# EAGLE board t6713 (EAGLE 8.4.2)
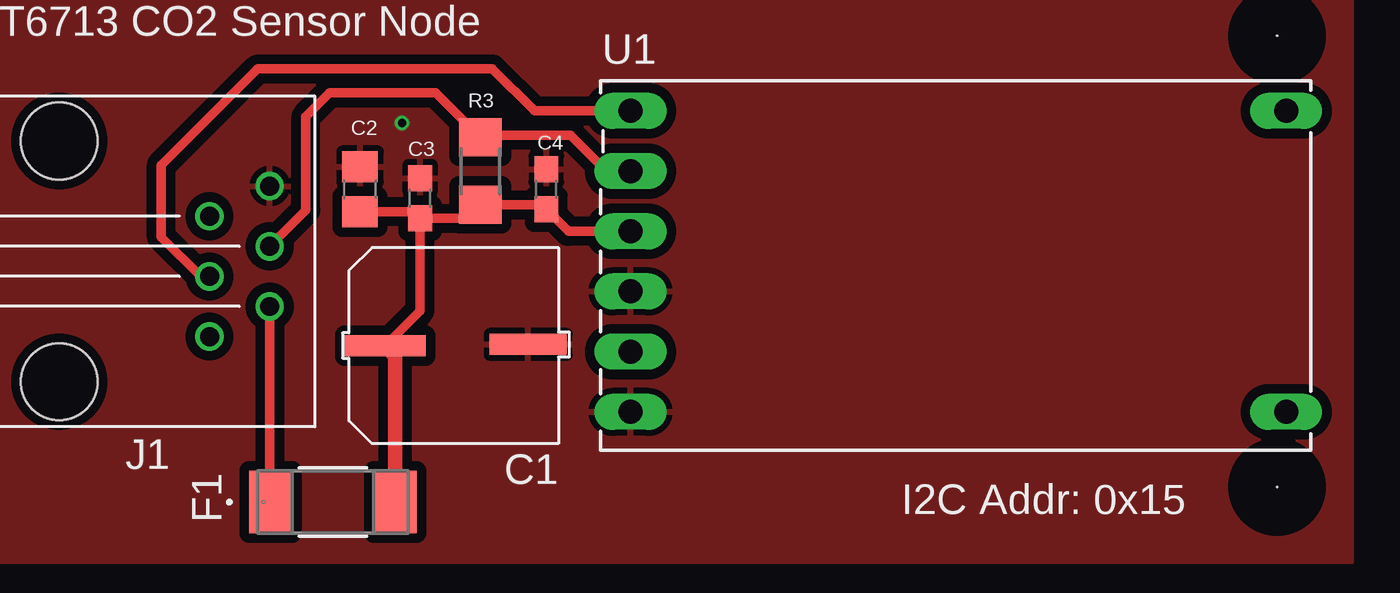
[diagram p0: board, top side]
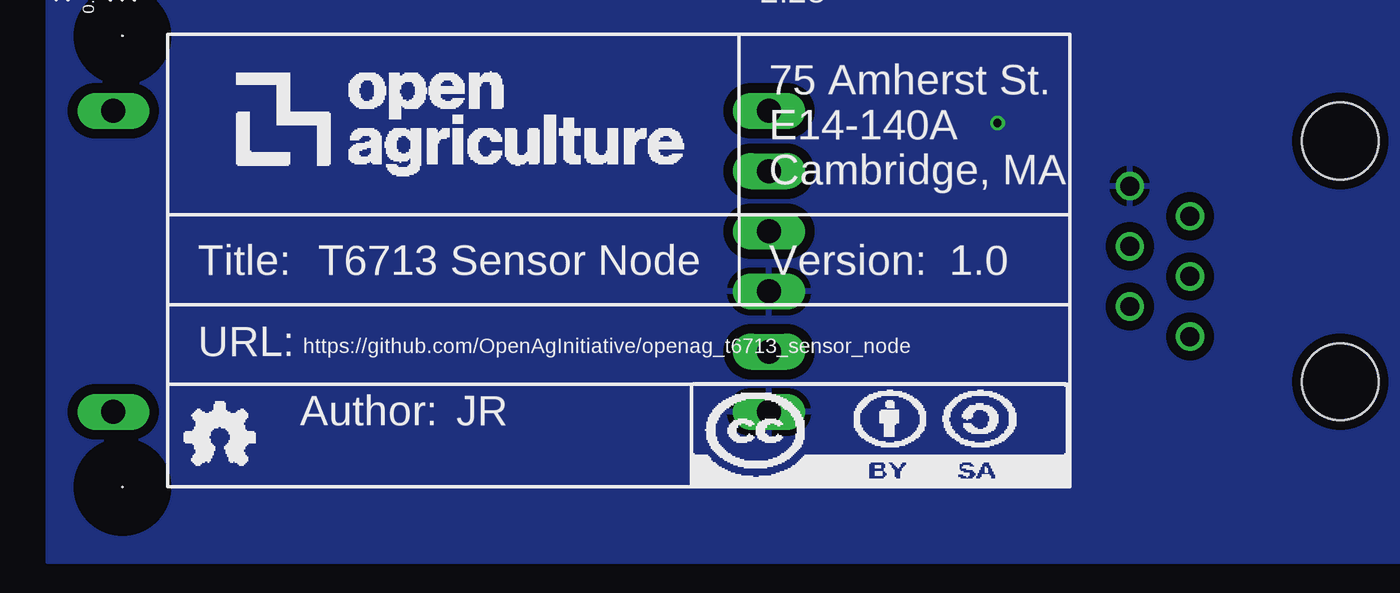
[diagram p1: board, bottom side, seen from below]

No outline drawn. Coordinates in mm, seen from the top.
Copper layers (1*16): Top 0.035559375mm / dielectric 1.6mm / Bottom 0.035559375mm
Design rules "oshpark-2layer": minimum track width 6mil, minimum drill 10mil, track to track 6mil, track to pad 6mil, pad to pad 6mil, via to via 6mil, smd to smd 6mil, copper to edge 15mil, drill to drill 6mil, minimum pad ring 5mil, minimum via ring 5mil, stop-mask expansion 2.5mil, vias tented up to drill 0mil, thermal gap 10mil
Holes 0 mm at 3.17,3.17 3.17,22.23 60.33,22.23 60.33,3.17
tRestrict: area 1.5,20.6 to 4.8,23.9; area 1.5,1.5 to 4.8,4.8; area 58.7,20.6 to 62,23.9; area 58.7,1.5 to 62,4.8
bRestrict: area 1.5,1.5 to 4.8,4.8; area 1.5,20.6 to 4.8,23.9; area 58.7,20.6 to 62,23.9; area 58.7,1.5 to 62,4.8

## Footprints (pad centres in the part's own frame; a part is rotated, then mirrored left to right if it is on the bottom)
EEE-1HA101UP = smd 0.889 x 3.404: + 0,-3.251 | smd 0.889 x 3.251: - -0.051,2.794
C0805 = smd 1.3 x 1.5: 1 -0.95,0; 2 0.95,0
C0603 = smd 1.1 x 1: 1 -0.85,0; 2 0.85,0
SS = smd 1.803 x 2.642: 1 -2.629,0; 2 2.629,0
RJ12 = drill 0.8: 1 -8.89,-3.175; 2 -6.35,-1.905; 3 -8.89,-0.635; 4 -6.35,0.635; 5 -8.89,1.905; 6 -6.35,3.175 | hole 3.25: 0,-5.08; 0,5.08
R1206 = smd 1.6 x 1.803: 1 -1.422,0; 2 1.422,0
T6713 = drill 1.016 long: 1 1.27,-1.27; 2 1.27,-3.81; 3 1.27,-6.35; 4 1.27,-8.89; 5 1.27,-11.43; 6 1.27,-13.97; 7 28.96,-13.97; 8 28.96,-1.27

## Placement (x,y rotation side)
C1  100uF  [EEE-1HA101UP]  25.91,9.14 270 top
C2  4.7uF  [C0805]  21.59,15.75 90 top
C3  0.1uF  [C0603]  24.13,15.37 90 top
C4  0.1uF  [C0603]  29.46,15.75 90 top
F1  SST 7  [SS]  20.45,2.54 0 top
FRAME1  [DOCFIELD]  58.42,3.17 0 bottom
J1  RJ12  [RJ12]  8.89,12.7 180 top
R3  4.7K  [R1206]  26.67,16.51 90 top
U1  T6713-5K  [T6713]  31.75,20.32 0 top

## Library data of the parts
C1-C4 = openag-capacitors; POPULATE: YES; VERIFIED: NO
F1 = openag-fuses; POPULATE: YES; VERIFIED: NO
FRAME1 = openag-frames; AUTHOR: JR; TITLE: T6713 Sensor Node; URL: https://github.com/OpenAgInitiative/openag_t6713_sensor_node; VER: 1.0
J1 = openag-connectors; POPULATE: YES; VERIFIED: NO
R3 = openag-resistors; POPULATE: YES; VERIFIED: NO
U1 = openag-sensors; POPULATE: YES; VERIFIED: NO

## Nets
3V3_IN: F1.1 J1.5
5V_IN: J1.6
+3V3: C1.+ C2.1 C3.1 C4.1 F1.2 R3.1 U1.3
GND: C1.- C2.2 C3.2 C4.2 J1.1 U1.4 U1.6
IO: J1.2
SCL: J1.3 R3.2 U1.2
SDA: J1.4 U1.1

## Tracks (layer width: path | path; a pad name or v marks a point on that pad's centre or on a via)
3V3_IN
  Top 0.406: J1.5 17.78,2.58 F1.1
+3V3
  Top 0.152: C3.1 24.19,14.58
  Top 0.406: C1.+ 24.13,10.62 C3.1 | C3.1 23.85,14.8 C2.1 | C3.1 26.1,14.52 R3.1 29.27,15.09 C4.1 30.39,13.97 U1.3
  Top 0.61: F1.2 23.08,8.72 C1.+
GND  (via drill 0.35)
  other vias: 23.37,18.54
  pour Top (isolate 0.406): 0,25.4 63.5,25.4 63.5,0 0,0
  pour Bottom (isolate 0.406): 63.5,25.4 63.5,0 0,0 0,25.4
SCL
  Top 0.406: J1.3 19.3,14.86 19.3,18.8 20.32,19.81 24.79,19.81 R3.2 26.77,18.03 30.48,18.03 32,16.51 U1.2
SDA
  Top 0.406: J1.4 14.86,12.06 13.21,13.72 13.21,16.76 17.27,20.83 27.18,20.83 28.96,19.05 U1.1

## Text on the board
tPlace: T6713 CO2 Sensor Node | I2C Addr: 0x15
bPlace: 2.25" | 0.125" | d=0.15" | 0.75" | 0.125"